# Altium PCB 175-00024_rev1, Backplane, Instrument Crate.PcbDoc (part 4 of 4)
Units mil, origin at the board's own origin, x right, y up, seen from the top; angles counter-clockwise.
Board outline 8400 x 10183.07 mil, 8 copper layers (Top Layer (*.GTL), Mid-Layer 1 (*.G1), +24V (*.GP1), RTN (*.GP2), +3.3V (*.GP3), +12V (*.GP4), Signal GND (*.GP5), Bottom Layer (*.GBL)); 192 components, 150 nets, 1439 pads, 415 vias.
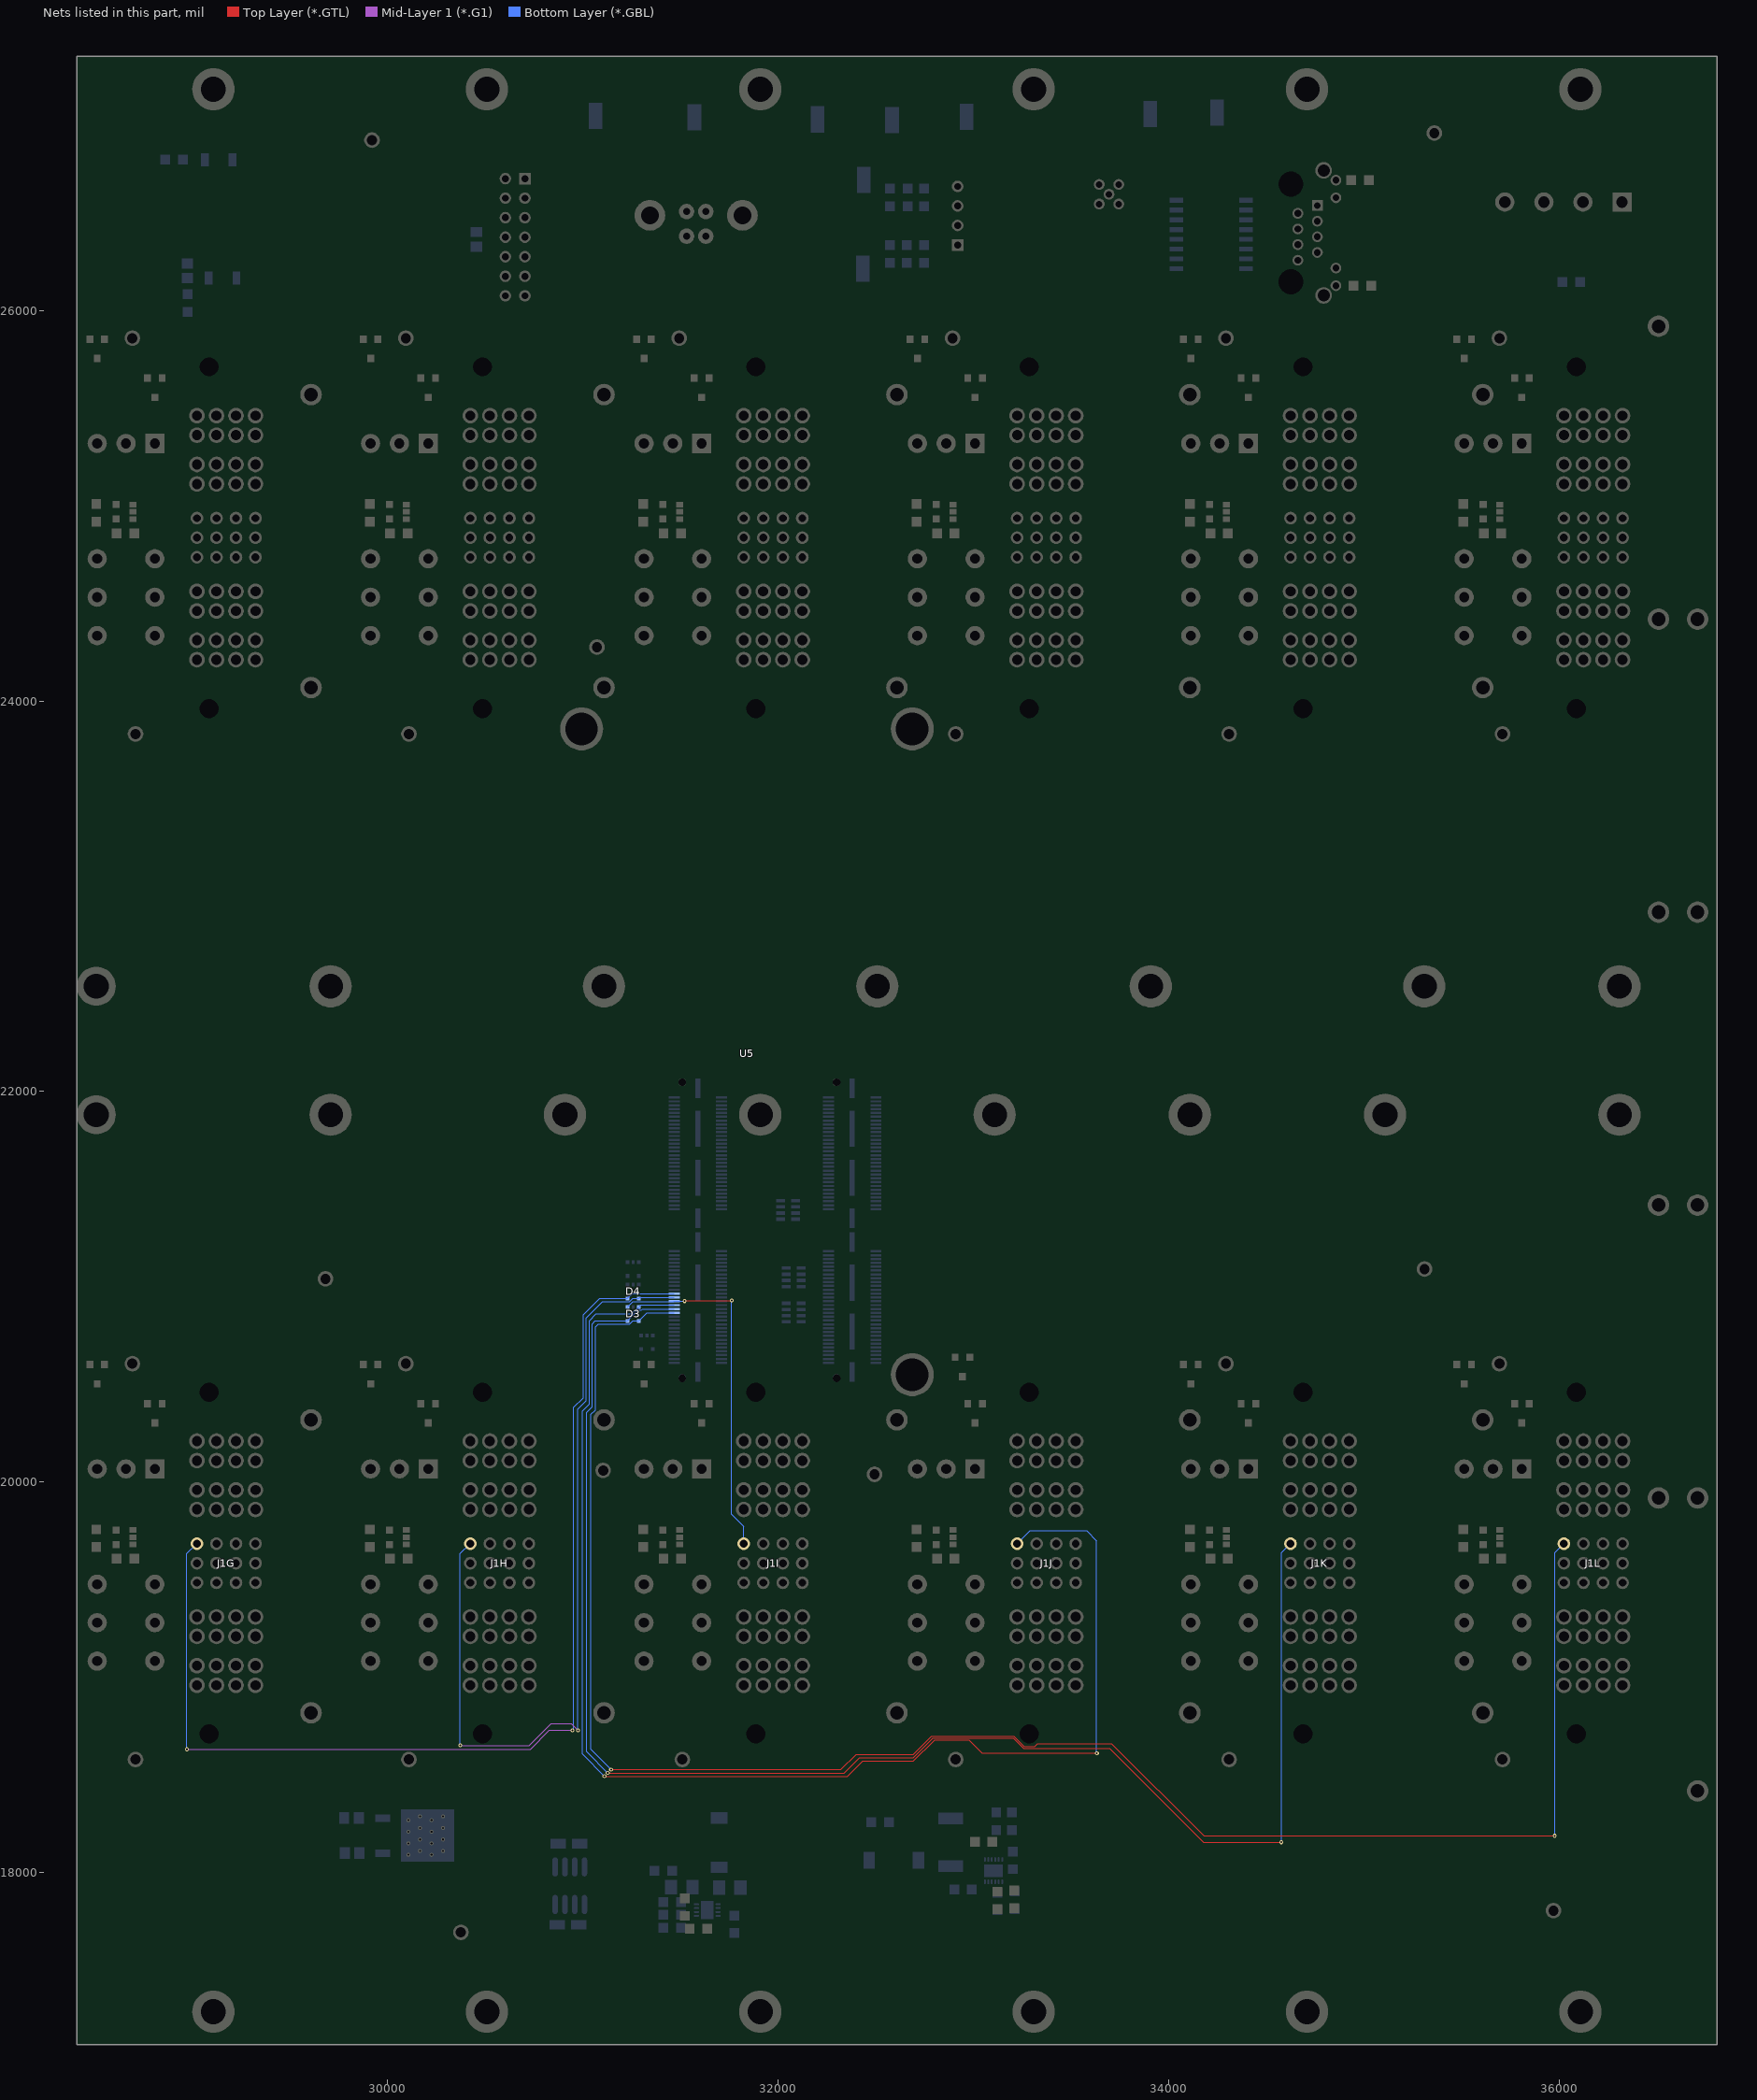
[diagram p10: the nets of this part, all layers, seen from the top]

## Via types
v1: diameter 20, hole 10, Top Layer (*.GTL) to Bottom Layer (*.GBL), 337 vias
v2: diameter 24, hole 10, Top Layer (*.GTL) to Bottom Layer (*.GBL), 48 vias
v3: diameter 50, hole 28, Top Layer (*.GTL) to Bottom Layer (*.GBL), 26 vias
v4: diameter 25.98, hole 12.99, Top Layer (*.GTL) to Bottom Layer (*.GBL), tented top, 4 vias

## Nets (pads, with @x,y where several pads share a name; then routed paths per layer and width w, separated by ;. In a path a pad name is that pad's centre, name@x,y a point inside that pad or via, vN(x,y) a via of type N, cw(c..) or ccw(c..) an arc to the next point about the centre after c; other vN are vias at no path point) (continued)
~CS_SLOT7: D4.5 J1G.9 U5.A83 | length 5750.1
  Mid-Layer 1 (*.G1) w5: v1(28975,18632.08) 30734,18632.08 30831,18729.08 v1(30949,18729.08)
  Bottom Layer (*.GBL) w5: v1(28975,18632.08) 28974,18633.08 28974,19633.64 J1G.9@29025.5,19685.14 ; v1(30949,18729.08) 30955,18735.08 30955,18845.08 30955,20383.53 31003.77,20432.3 31003.77,20857.3 31087.2,20940.73 D4.5@31230,20940.73 31254.76,20965.5 U5.A83@31469.12,20965.5
~CS_SLOT8: D4.4 J1H.9 U5.A85 | length 4341.8
  Mid-Layer 1 (*.G1) w5: v1(30374,18652.08) 30726,18652.08 30838.5,18764.58 30941.5,18764.58 v1(30977,18729.08)
  Bottom Layer (*.GBL) w5: v1(30374,18652.08) 30374,19633.64 J1H.9@30425.5,19685.14 ; v1(30977,18729.08) 30977,18845.08 30977,20374.42 31019.33,20416.75 31019.33,20841.75 31101.97,20924.39 31242.53,20924.39 31258.88,20940.73 D4.4@31289.06,20940.73 31294.13,20945.81 U5.A85@31469.12,20945.81
~CS_SLOT9: D3.1 J1I.9 U5.A87 | length 1819.9
  Top Layer (*.GTL) w5: v1(31522,20927.08) 31525,20930.08 v1(31764,20930.08)
  Bottom Layer (*.GBL) w5: D3.1@31230,20896.6 31257.79,20924.39 31467.39,20924.39 U5.A87@31469.12,20926.13 31470.07,20927.08 v1(31522,20927.08) ; v1(31764,20930.08) 31762,20928.08 31762,19835.91 31825.5,19772.41 J1I.9@31825.5,19685.14
~CS_SLOT10: D3.3 J1J.9 U5.A89 | length 7033.6
  Top Layer (*.GTL) w5: v1(31112.06,18494.14) 32356.94,18494.14 32434.94,18572.14 32695,18572.14 32802.94,18680.08 32978.46,18680.08 33046.73,18611.81 v1@33634,18611.81
  Bottom Layer (*.GBL) w5: v1(31112.06,18494.14) 30999,18607.2 30999,20365.3 31034.89,20401.19 31034.89,20826.19 31069.79,20861.1 31250.94,20861.1 31286.44,20896.6 D3.3@31289.06,20896.6 31298.9,20906.44 U5.A89@31469.12,20906.44 ; J1J.9@33225.5,19685.14 33292.44,19752.08 33581,19752.08 33633,19700.08 33633,18613.08 v1(33634,18612.08)
~CS_SLOT11: D3.5 J1K.9 U5.A91 | length 8100
  Top Layer (*.GTL) w5: v1(31129.03,18511.11) 32339.97,18511.11 32417.97,18589.11 32695,18589.11 32794.97,18689.08 33205.62,18689.08 33258.06,18636.64 33318.94,18636.64 33319.11,18636.81 33699.34,18636.81 34181.07,18155.08 v1@34579,18155.08
  Bottom Layer (*.GBL) w5: v1(31129.03,18511.11) 31021,18619.14 31021,20356.19 31050.44,20385.64 31050.44,20810.64 31065.54,20825.73 D3.5@31230,20825.73 31284.52,20880.26 31301.59,20880.26 31308.09,20886.76 U5.A91@31469.12,20886.76 ; v1(34579,18156.08) 34579,19638.64 J1K.9@34625.5,19685.14
~CS_SLOT12: D3.4 J1L.9 U5.A93 | length 9395.1
  Top Layer (*.GTL) w5: v1(31146,18528.08) 32323,18528.08 32401,18606.08 32695,18606.08 32787,18698.08 33209.35,18698.08 33261.78,18645.64 33315.22,18645.64 33331.38,18661.81 33709.69,18661.81 34181.42,18190.08 v1@35979,18190.08
  Bottom Layer (*.GBL) w5: v1(31146,18528.08) 31043,18631.08 31043,20347.08 31066,20370.08 31066,20795.08 31080.31,20809.39 31242.53,20809.39 31258.88,20825.73 D3.4@31289.06,20825.73 31330.39,20867.07 U5.A93@31469.12,20867.07 ; v1(35978,18189.08) 35979,18190.08 35979,19638.64 J1L.9@36025.5,19685.14
pads on no net: D5.5 J1A.0 J1A.3 J1A.4 J1A.7 J1A.8 J1B.0 J1B.3 J1B.4 J1B.7 J1B.8 J1C.0 J1C.3 J1C.4 J1C.7 J1C.8 J1D.0 J1D.3 J1D.4 J1D.7 J1D.8 J1E.0 J1E.3 J1E.4 J1E.7 J1E.8 J1F.0 J1F.3 J1F.4 J1F.7 J1F.8 J1G.0 J1G.3 J1G.4 J1G.7 J1G.8 J1H.0 J1H.3 J1H.4 J1H.7 J1H.8 J1I.0 J1I.3 J1I.4 J1I.7 J1I.8 J1J.0 J1J.3 J1J.4 J1J.7 J1J.8 J1K.0 J1K.3 J1K.4 J1K.7 J1K.8 J1L.0 J1L.3 J1L.4 J1L.7 J1L.8 J2.3 J3.4 J3.5 J3.7 J3.8 J3.MH1 J3.MH2 K1A.12 K1B.12 K1C.12 K1D.12 K1E.12 K1F.12 K1G.12 K1H.12 K1I.12 K1J.12 K1K.12 K1L.12 L1.2 L1.4 L1.5 L1.7 L1.12 L1.13 U5.0 U5.1 U5.A2 U5.A4 U5.A6 U5.A8 U5.A10 U5.A12 U5.A14 U5.A16 U5.A18 U5.A20 U5.A22 U5.A24 U5.A26 U5.A28 U5.A30 U5.A32 U5.A34 U5.A36 U5.A38 U5.A40 U5.A41 U5.A42 U5.A43 U5.A44 U5.A46 U5.A48 U5.A50 U5.A52 U5.A54 U5.A56 U5.A57 U5.A58 U5.A59 U5.A60 U5.A61 U5.A62 U5.A63 U5.A64 U5.A65 U5.A67 U5.A69 U5.A72 U5.A74 U5.A76 U5.A78 U5.A80 U5.A82 U5.A84 U5.A86 U5.A88 U5.A90 U5.A92 U5.A94 U5.A96 U5.A97 U5.A98 U5.A99 U5.A100 U5.A101 U5.A102 U5.A104 U5.A106 U5.A107 U5.A108 U5.A110 U5.A112 U5.A113 U5.A114 U5.A115 U5.A116 U5.A117 U5.A118 U5.A119 U5.A120 U5.B1 U5.B3 U5.B5 U5.B7 U5.B9 U5.B11 U5.B13 U5.B15 U5.B17 U5.B19 U5.B21 U5.B23 U5.B25 U5.B27 U5.B29 U5.B31 U5.B33 U5.B35 U5.B37 U5.B39 U5.B41 U5.B43 U5.B45 U5.B69 U5.B90 U5.B91 U5.B92 U5.B93 U5.B94 U5.B95 U5.B96 U5.B97 U5.B98 U5.B99 U5.B100 U5.B101 U5.B102 U5.B103 U5.B104 U5.B105 U5.B106 U5.B107 U5.B108 U5.B109 U5.B110 U5.B111 U5.B112 U5.B113 U5.B114 U5.B115 U5.B116 U5.B117 U5.B118 U5.B119 U5.B120 U21.3 U21.11 U22.1 U22.6 U22.7 U23.3 U23.4
copper on no net: | length 426.6
  Bottom Layer (*.GBL) w10: 35378.9,17586 ccw(c35311,17586) 35378.9,17586

## Polygon pours and split planes (outlines as drawn)
+24V on Bottom Layer (*.GBL) "Bottom Layer-AGND" (solid, pour order 20): 33143.8,18053.34 33238.8,18053.34 33238.8,18168.34 33143.8,18168.34 33143.8,18053.34
GND on Bottom Layer (*.GBL) "Bottom Layer-AGND" (solid, pour order 21): 33137,17975.08 33137,18053.34 33237,18053.34 33237,17975.08 33137,17975.08
+3.3V on Bottom Layer (*.GBL) "Bottom Layer-AGND" (solid, pour order 22): 32419.8,17872.52 32419.8,17823.34 33083.82,17823.34 33083.82,17958.1 33085,17959.08 33083.82,17958.1 33072.05,17958.1 33072.05,17872.52 32419.8,17872.52
NetC11_1 on Bottom Layer (*.GBL) "Top Layer (*.GTL)-No Net" (solid, pour order 16): 32939.12,17866.32 32939.12,17970.58 32809.45,17970.58 32809.45,18106.11 33053.83,18106.11 33058.81,18100.9 33063.8,18106.11 33063.8,18356.32 32689.75,18356.32 32669.8,18356.32 32669.8,17866.32 32939.12,17866.32
+3.3V on Bottom Layer (*.GBL) "Top Layer (*.GTL)-No Net" (solid, pour order 18): 32684.8,17856.32 32679.8,17861.32 32679.8,18356.32 32419.8,18356.32 32419.8,17856.32 32679.8,17856.32
NetC11_1 on Bottom Layer (*.GBL) "Top Layer (*.GTL)-No Net" (solid, pour order 17): 33063.8,18336.32 33084.8,18336.32 33084.8,18051.32 33082.78,18053.34 33063.8,18053.34 33063.8,18336.32
NetD1_1 on Bottom Layer (*.GBL) "Bottom Layer-AGND" (solid, pour order 19): 33063.8,18053.34 33032.37,18053.34 33032.37,17963.34 32799.8,17963.34 32799.8,18098.34 33063.8,18098.34 33063.8,18053.34
+12V on Bottom Layer (*.GBL) "Bottom Layer-AGND" (solid, pour order 26): 31385.98,17819.54 31385.98,18326 31784.98,18326 31782.9,18323.73 31782.9,17815 31390.15,17815 31385.98,17819.54
GND on Bottom Layer (*.GBL) "Bottom Layer-AGND" (solid, pour order 23): 31608.98,17835.96 31515.98,17835.96 31515.98,17973.04 31516.98,17974 31742.98,17974 31742.98,17880.05 31670.98,17880.05 31670.98,17835 31609.98,17835 31608.98,17835.96
NetL3_1 on Bottom Layer (*.GBL) "Bottom Layer-AGND" (solid, pour order 24): 31680.98,17838 31680.98,17978 31677.98,17981 31637.98,17981 31637.98,18066 31782.98,18066 31782.98,17834 31684.98,17834 31680.98,17838
+24V on Bottom Layer (*.GBL) "Bottom Layer-AGND" (solid, pour order 25): 31682.98,17812 31682.98,17826 31682.98,17850 31683.98,17851 31771.98,17851 31771.98,17985 31885.98,17985 31885.98,17811 31884.98,17812 31682.98,17812
NetK1F_11 on +24V (*.GP1) (split plane): 35909.9,24644 35909.9,24449.1 35440.1,24449.1 35440.1,24933.9 35909.9,24933.9
NetK1E_11 on +24V (*.GP1) (split plane): 34509.9,24644 34509.9,24449.1 34040.1,24449.1 34040.1,24933.9 34509.9,24933.9
NetJ1F_13 on +24V (*.GP1) (split plane): 36474.9,24164.1 35440.1,24164.1 35440.1,24438.9 35915,24438.9 35916.95,24439.29 35918.6,24440.4 35919.71,24442.05 35920.1,24444 35920.1,24638.9 36474.9,24638.9
NetJ1E_13 on +24V (*.GP1) (split plane): 35074.9,24164.1 34040.1,24164.1 34040.1,24438.9 34515,24438.9 34516.95,24439.29 34518.6,24440.4 34519.71,24442.05 34520.1,24444 34520.1,24638.9 35074.9,24638.9
NetJ1D_13 on +24V (*.GP1) (split plane): 33674.9,24164.1 32640.1,24164.1 32640.1,24438.9 33115,24438.9 33116.95,24439.29 33118.6,24440.4 33119.71,24442.05 33120.1,24444 33120.1,24638.9 33674.9,24638.9
NetK1D_11 on +24V (*.GP1) (split plane): 33109.9,24644 33109.9,24449.1 32640.1,24449.1 32640.1,24933.9 33109.9,24933.9
NetJ1C_13 on +24V (*.GP1) (split plane): 32274.9,24164.1 31240.1,24164.1 31240.1,24438.9 31715,24438.9 31716.95,24439.29 31718.6,24440.4 31719.71,24442.05 31720.1,24444 31720.1,24638.9 32274.9,24638.9
NetJ1L_13 on +24V (*.GP1) (split plane): 36474.89,18912.92 35440.09,18912.92 35440.09,19187.72 35914.99,19187.72 35916.94,19188.11 35918.59,19189.21 35919.7,19190.87 35920.09,19192.82 35920.09,19387.72 36474.89,19387.72
NetK1L_11 on +24V (*.GP1) (split plane): 35909.89,19392.82 35909.89,19197.92 35440.09,19197.92 35440.09,19682.72 35909.89,19682.72
NetJ1K_13 on +24V (*.GP1) (split plane): 35074.89,18912.92 34040.09,18912.92 34040.09,19187.72 34514.99,19187.72 34516.94,19188.11 34518.59,19189.21 34519.7,19190.87 34520.09,19192.82 34520.09,19387.72 35074.89,19387.72
NetK1K_11 on +24V (*.GP1) (split plane): 34509.89,19392.82 34509.89,19197.92 34040.09,19197.92 34040.09,19682.72 34509.89,19682.72
NetK1J_11 on +24V (*.GP1) (split plane): 33109.89,19392.82 33109.89,19197.92 32640.09,19197.92 32640.09,19682.72 33109.89,19682.72
NetJ1J_13 on +24V (*.GP1) (split plane): 33674.89,18912.92 32640.09,18912.92 32640.09,19187.72 33114.99,19187.72 33116.94,19188.11 33118.59,19189.21 33119.7,19190.87 33120.09,19192.82 33120.09,19387.72 33674.89,19387.72
NetK1C_11 on +24V (*.GP1) (split plane): 31709.9,24644 31709.9,24449.1 31240.1,24449.1 31240.1,24933.9 31709.9,24933.9
NetJ1B_13 on +24V (*.GP1) (split plane): 30874.9,24164.1 29840.1,24164.1 29840.1,24438.9 30315,24438.9 30316.95,24439.29 30318.6,24440.4 30319.71,24442.05 30320.1,24444 30320.1,24638.9 30874.9,24638.9
NetK1I_11 on +24V (*.GP1) (split plane): 31709.89,19392.82 31709.89,19197.92 31240.09,19197.92 31240.09,19682.72 31709.89,19682.72
NetK1B_11 on +24V (*.GP1) (split plane): 30309.9,24644 30309.9,24449.1 29840.1,24449.1 29840.1,24933.9 30309.9,24933.9
NetK1A_11 on +24V (*.GP1) (split plane): 28909.9,24644 28909.9,24449.1 28440.1,24449.1 28440.1,24933.9 28909.9,24933.9
NetJ1A_13 on +24V (*.GP1) (split plane): 29474.9,24164.1 28440.1,24164.1 28440.1,24438.9 28915,24438.9 28916.95,24439.29 28918.6,24440.4 28919.71,24442.05 28920.1,24444 28920.1,24638.9 29474.9,24638.9
NetJ1I_13 on +24V (*.GP1) (split plane): 32274.89,18912.92 31240.09,18912.92 31240.09,19187.72 31714.99,19187.72 31716.94,19188.11 31718.59,19189.21 31719.7,19190.87 31720.09,19192.82 31720.09,19387.72 32274.89,19387.72
+24V on +24V (*.GP1) (split plane): 36789.9,17139.1 28430.1,17139.1 28430.1,18906.78 28430.28,18905.87 28431.38,18904.21 28433.04,18903.11 28434.99,18902.72 29479.99,18902.72 29481.94,18903.11 29483.59,18904.21 29484.7,18905.87 29485.09,18907.82 29485.09,19392.82 29484.7,19394.77 29483.59,19396.42 29481.94,19397.53 29479.99,19397.92 28920.09,19397.92 28920.09,19687.82 28919.7,19689.77 28918.59,19691.42 28916.94,19692.53 28914.99,19692.92 28434.99,19692.92 28433.04,19692.53 28431.38,19691.42 28430.28,19689.77 28430.1,19688.86 28430.1,24158.02 28430.29,24157.05 28431.4,24155.4 28433.05,24154.29 28435,24153.9 29480,24153.9 29481.95,24154.29 29483.6,24155.4 29484.71,24157.05 29485.1,24159 29485.1,24644 29484.71,24645.95 29483.6,24647.6 29481.95,24648.71 29480,24649.1 28920.1,24649.1 28920.1,24939 28919.71,24940.95 28918.6,24942.6 28916.95,24943.71 28915,24944.1 28435,24944.1 28433.05,24943.71 28431.4,24942.6 28430.29,24940.95 28430.1,24939.98 28430.1,27281.97 36789.9,27281.97
NetJ1H_13 on +24V (*.GP1) (split plane): 30874.89,18912.92 29840.09,18912.92 29840.09,19187.72 30314.99,19187.72 30316.94,19188.11 30318.59,19189.21 30319.7,19190.87 30320.09,19192.82 30320.09,19387.72 30874.89,19387.72
NetK1H_11 on +24V (*.GP1) (split plane): 30309.89,19392.82 30309.89,19197.92 29840.09,19197.92 29840.09,19682.72 30309.89,19682.72
NetK1G_11 on +24V (*.GP1) (split plane): 28909.89,19392.82 28909.89,19197.92 28440.09,19197.92 28440.09,19682.72 28909.89,19682.72
NetJ1G_13 on +24V (*.GP1) (split plane): 29474.89,18912.92 28440.09,18912.92 28440.09,19187.72 28914.99,19187.72 28916.94,19188.11 28918.59,19189.21 28919.7,19190.87 28920.09,19192.82 28920.09,19387.72 29474.89,19387.72
RTN on RTN (*.GP2) (split plane): 36789.9,17139.1 28430.1,17139.1 28430.1,27281.97 36789.9,27281.97
+3.3V on +3.3V (*.GP3) (split plane): 36789.9,17139.1 28430.1,17139.1 28430.1,27281.97 36789.9,27281.97
+12V on +12V (*.GP4) (split plane): 36789.9,17139.1 28430.1,17139.1 28430.1,27281.97 36789.9,27281.97
GND on Signal GND (*.GP5) (split plane): 36789.9,17139.1 28430.1,17139.1 28430.1,27281.97 36789.9,27281.97

## Other copper
Top Layer (*.GTL):
  text "*.GTL - TOP LAYER GERBER DATA" at 31185,16073 h80
Mid-Layer 1 (*.G1):
  text "*.G1 - MID LAYER 1 GERBER DATA" at 31189,16073 h80
Bottom Layer (*.GBL):
  text "PCB, 175-00029, REV 1" at 35321,17849 h60
  text "BACKPLANE, INSTRUMENT CRATE" at 35338,17716 h60
  text "LAS CUMBRES OBSERVATORY" at 34753,17571 h60
  text "c  2011" at 35333,17566 h60
  text "*.GBL - BOTTOM LAYER GERBER DATA" at 31185,16073 h80
+24V (*.GP1) (plane layer: these items are gaps in the copper):
  lines w10: 28434.99,19192.82 28434.99,18907.82 29479.99,18907.82 29479.99,19392.82 28914.99,19392.82 ; 28434.99,19192.82 28914.99,19192.82 28914.99,19392.82 ; 28434.99,19192.82 28434.99,19687.82 28914.99,19687.82 28914.99,19392.82 ; 28435,24444 28435,24939 28915,24939 28915,24644 ; 28435,24444 28915,24444 28915,24644 ; 28435,24444 28435,24159 29480,24159 29480,24644 28915,24644 ; 29834.99,19192.82 29834.99,18907.82 30879.99,18907.82 30879.99,19392.82 30314.99,19392.82 ; 29834.99,19192.82 30314.99,19192.82 30314.99,19392.82 ; 29834.99,19192.82 29834.99,19687.82 30314.99,19687.82 30314.99,19392.82 ; 29835,24444 29835,24159 30880,24159 30880,24644 30315,24644 ; 29835,24444 30315,24444 30315,24644 ; 29835,24444 29835,24939 30315,24939 30315,24644 ; 31234.99,19192.82 31234.99,18907.82 32279.99,18907.82 32279.99,19392.82 31714.99,19392.82 ; 31234.99,19192.82 31714.99,19192.82 31714.99,19392.82 ; 31234.99,19192.82 31234.99,19687.82 31714.99,19687.82 31714.99,19392.82 ; 31235,24444 31235,24159 32280,24159 32280,24644 31715,24644 ; 31235,24444 31715,24444 31715,24644 ; 31235,24444 31235,24939 31715,24939 31715,24644 ; 32634.99,19192.82 32634.99,18907.82 33679.99,18907.82 33679.99,19392.82 33114.99,19392.82 ; 32634.99,19192.82 33114.99,19192.82 33114.99,19392.82 ; 32634.99,19192.82 32634.99,19687.82 33114.99,19687.82 33114.99,19392.82 ; 32635,24444 32635,24159 33680,24159 33680,24644 33115,24644 ; 32635,24444 33115,24444 33115,24644 ; 32635,24444 32635,24939 33115,24939 33115,24644 ; 34034.99,19192.82 34034.99,18907.82 35079.99,18907.82 35079.99,19392.82 34514.99,19392.82 ; 34034.99,19192.82 34514.99,19192.82 34514.99,19392.82 ; 34034.99,19192.82 34034.99,19687.82 34514.99,19687.82 34514.99,19392.82 ; 34035,24444 34035,24159 35080,24159 35080,24644 34515,24644 ; 34035,24444 34515,24444 34515,24644 ; 34035,24444 34035,24939 34515,24939 34515,24644 ; 35434.99,19192.82 35434.99,18907.82 36479.99,18907.82 36479.99,19392.82 35914.99,19392.82 ; 35434.99,19192.82 35914.99,19192.82 35914.99,19392.82 ; 35434.99,19192.82 35434.99,19687.82 35914.99,19687.82 35914.99,19392.82 ; 35435,24444 35435,24159 36480,24159 36480,24644 35915,24644 ; 35435,24444 35915,24444 35915,24644 ; 35435,24444 35435,24939 35915,24939 35915,24644
  text "*.GP1 - INTERNAL PLANE LAYER 1 GERBER DATA" at 31204,16073 h80
RTN (*.GP2) (plane layer: these items are gaps in the copper):
  text "*.GP2 - INTERNAL PLANE LAYER 2 GERBER DATA" at 31185,16073 h80
+12V (*.GP4) (plane layer: these items are gaps in the copper):
  text "*.GP4 - INTERNAL PLANE LAYER 4 GERBER DATA" at 31185,16073 h80
Signal GND (*.GP5) (plane layer: these items are gaps in the copper):
  text "*.GP5- INTERNAL PLANE LAYER 5 GERBER DATA" at 31185,16073 h80
+3.3V (*.GP3) (plane layer: these items are gaps in the copper):
  text "*.GP3- INTERNAL PLANE LAYER 3 GERBER DATA" at 31213,16073 h80

## Silkscreen, mask and mechanical layers (free items; w line width, h text height)
Top Overlay:
  circle w10: c32688.41,20550.14 r111.73
  rectangle: 35050,17790 35434,18112
  text "SCH, 780-00029 Rev:" at 33850,17952 h60
  text "BACKPLANE, INSTRUMENT CRATE" at 33838,17674 h60
  text "*.GTO - TOP OVERLAY GERBER DATA" at 31185,16073 h80
Bottom Overlay:
  text "SCL" at 34315,27124 h60
  text "+3.3V" at 31214,27112.08 h60
  text "SDA" at 33981,27112 h60
  text "+5V" at 31661,27107.08 h60
  text "-12V" at 32330,27097.08 h60
  text "+12V" at 32714,27097.08 h60
  text "+24V" at 33098,27097.08 h60
  text "GND" at 35436,26997.08 h60
  text "GND" at 30010,26970.08 h60
  text "ALL ON" at 29455,26878.08 h120
  text "+24V" at 36340,26850 h60
  text "GND" at 35891,26844 h60
  text "JTAG" at 30487,26640 h60
  text "ALL OFF" at 29423,26310.08 h120
  text "GND" at 35395,21194.08 h60
  text "GND" at 29761,21125 h60
  text "GND" at 36057,17887 h60
  text "GND" at 30448,17752 h60
  text "*GBO - BOTTOM OVERLAY GERBER DATA" at 31185,16073 h80
Top Paste:
  text "*.GTP - TOP-SIDE SOLDER PASTE MASK" at 31184.99,16073.01 h80
Bottom Paste:
  text "*.GBP - BOTTOM-SIDE SOLDER PASTE MASK" at 31184.99,16073.01 h80
Top Solder:
  text "*.GTS - TOP SOLDER MASK GERBER DATA" at 31185,16073 h80
Bottom Solder:
  rectangle: 33346,17485 35397,17945
  text "*.GBS - BOTTOM SOLDER MASK GERBER DATA" at 31185,16073 h80
Mechanical 1:
  lines w25: 28725.24,20751.36 ccw(c28825.24,20751.36) 28825.24,20651.36 29374.76,20651.36 ; 28820.24,22762.08 cw(c28820.24,22862.08) 28720.24,22862.08 28720.24,23671.11 ; 28821.21,22761.6 29370.24,22761.6 ccw(c29370.24,22861.6) 29470.24,22861.6 29470.24,23671.6 ; 28824.76,20651.36 cw(c28824.76,20751.36) 28724.76,20751.36 28724.76,21560.39 cw(c28824.76,21560.39) 28824.76,21660.39 ; 28825.24,21660.88 29374.76,21660.88 cw(c29374.76,21560.88) 29474.76,21560.88 29474.76,20750.88 cw(c29374.76,20750.88) 29374.76,20650.88 28825.72,20650.88 ; 29375.24,20651.84 ccw(c29375.24,20751.84) 29475.24,20751.84 ; 30105.24,20741.36 ccw(c30205.24,20741.36) 30205.24,20641.36 30754.76,20641.36 ; 30204.76,20641.36 cw(c30204.76,20741.36) 30104.76,20741.36 30104.76,21550.39 cw(c30204.76,21550.39) 30204.76,21650.39 ; 30205.24,21650.88 30754.76,21650.88 cw(c30754.76,21550.88) 30854.76,21550.88 30854.76,20740.88 cw(c30754.76,20740.88) 30754.76,20640.88 30205.72,20640.88 ; 30220.24,22762.08 cw(c30220.24,22862.08) 30120.24,22862.08 30120.24,23671.11 ; 30221.21,22761.6 30770.24,22761.6 ccw(c30770.24,22861.6) 30870.24,22861.6 30870.24,23671.6 ; 30755.24,20641.84 ccw(c30755.24,20741.84) 30855.24,20741.84 ; 31644.76,22752.32 cw(c31644.76,22852.32) 31544.76,22852.32 31544.76,23661.36 ; 31645.72,22751.84 32194.76,22751.84 ccw(c32194.76,22851.84) 32294.76,22851.84 32294.76,23661.84 ; 33004.76,22762.32 cw(c33004.76,22862.32) 32904.76,22862.32 32904.76,23671.36 ; 33005.72,22761.84 33554.76,22761.84 ccw(c33554.76,22861.84) 33654.76,22861.84 33654.76,23671.84 ; 33045.24,20741.36 ccw(c33145.24,20741.36) 33145.24,20641.36 33694.76,20641.36 ; 33144.76,20641.36 cw(c33144.76,20741.36) 33044.76,20741.36 33044.76,21550.39 cw(c33144.76,21550.39) 33144.76,21650.39 ; 33145.24,21650.88 33694.76,21650.88 cw(c33694.76,21550.88) 33794.76,21550.88 33794.76,20740.88 cw(c33694.76,20740.88) 33694.76,20640.88 33145.72,20640.88 ; 33695.24,20641.84 ccw(c33695.24,20741.84) 33795.24,20741.84 ; 34365.24,21660.39 ccw(c34365.24,21560.39) 34265.24,21560.39 34265.24,20751.36 ; 34365.73,21660.88 34915.24,21660.88 cw(c34915.24,21560.88) 35015.24,21560.88 35015.24,20750.88 cw(c34915.24,20750.88) 34915.24,20650.88 34366.21,20650.88 ; 34404.76,22772.32 cw(c34404.76,22872.32) 34304.76,22872.32 34304.76,23681.36 ; 34405.72,22771.84 34954.76,22771.84 ccw(c34954.76,22871.84) 35054.76,22871.84 35054.76,23681.84 ; 34914.76,20651.36 34365.24,20651.36 ; 34915.24,20651.84 ccw(c34915.24,20751.84) 35015.24,20751.84 ; 35655.24,20761.36 ccw(c35755.24,20761.36) 35755.24,20661.36 36304.76,20661.36 ; 35744.76,22762.32 cw(c35744.76,22862.32) 35644.76,22862.32 35644.76,23671.36 ; 35745.72,22761.84 36294.76,22761.84 ccw(c36294.76,22861.84) 36394.76,22861.84 36394.76,23671.84 ; 35754.76,20661.36 cw(c35754.76,20761.36) 35654.76,20761.36 35654.76,21570.39 cw(c35754.76,21570.39) 35754.76,21670.39 ; 35755.24,21670.88 36304.76,21670.88 cw(c36304.76,21570.88) 36404.76,21570.88 36404.76,20760.88 cw(c36304.76,20760.88) 36304.76,20660.88 35755.72,20660.88 ; 36305.24,20661.84 ccw(c36305.24,20761.84) 36405.24,20761.84 ; 36810,27292.07 36810,17119 28410,17119 28410,27302.07 36810,27302.07 ; 28720.24,23671.11 cw(c28820.24,23671.11) 28820.24,23771.11 ccw(c28820.24,23671.11) 28720.24,23671.11 ; 29370.24,23771.6 cw(c29370.24,23671.6) 29470.24,23671.6 ; 29370.24,23771.6 cw(c29370.24,23671.6) 29470.24,23671.6 ; 29370.24,23771.6 28820.73,23771.6 29370.24,23771.6 ; 30120.24,23671.11 cw(c30220.24,23671.11) 30220.24,23771.11 ccw(c30220.24,23671.11) 30120.24,23671.11 ; 30770.24,23771.6 cw(c30770.24,23671.6) 30870.24,23671.6 ; 30770.24,23771.6 cw(c30770.24,23671.6) 30870.24,23671.6 ; 30770.24,23771.6 30220.73,23771.6 30770.24,23771.6 ; 31544.76,23661.36 cw(c31644.76,23661.36) 31644.76,23761.36 ccw(c31644.76,23661.36) 31544.76,23661.36 ; 32194.76,23761.84 cw(c32194.76,23661.84) 32294.76,23661.84 ; 32194.76,23761.84 cw(c32194.76,23661.84) 32294.76,23661.84 ; 32194.76,23761.84 31645.24,23761.84 32194.76,23761.84 ; 32904.76,23671.36 cw(c33004.76,23671.36) 33004.76,23771.36 ccw(c33004.76,23671.36) 32904.76,23671.36 ; 33554.76,23771.84 cw(c33554.76,23671.84) 33654.76,23671.84 ; 33554.76,23771.84 cw(c33554.76,23671.84) 33654.76,23671.84 ; 33554.76,23771.84 33005.24,23771.84 33554.76,23771.84 ; 34265.24,20751.36 ccw(c34365.24,20751.36) 34365.24,20651.36 ; 34265.24,20751.36 ccw(c34365.24,20751.36) 34365.24,20651.36 ; 34304.76,23681.36 cw(c34404.76,23681.36) 34404.76,23781.36 ccw(c34404.76,23681.36) 34304.76,23681.36 ; 34954.76,23781.84 cw(c34954.76,23681.84) 35054.76,23681.84 ; 34954.76,23781.84 cw(c34954.76,23681.84) 35054.76,23681.84 ; 34954.76,23781.84 34405.24,23781.84 34954.76,23781.84 ; 35644.76,23671.36 cw(c35744.76,23671.36) 35744.76,23771.36 ccw(c35744.76,23671.36) 35644.76,23671.36 ; 36294.76,23771.84 cw(c36294.76,23671.84) 36394.76,23671.84 ; 36294.76,23771.84 cw(c36294.76,23671.84) 36394.76,23671.84 ; 36294.76,23771.84 35745.24,23771.84 36294.76,23771.84
Mechanical 2:
  lines w10: 16128,12140 37128,12140 37128,28140 16128,28140 16128,12140 ; 33073,12246 ccw(c33123,12246) 33123,12196 33453,12196 ccw(c33453,12236) 33493,12236 33493,12406 ccw(c33453,12406) 33453,12446 33073,12446 33073,12246 ; 33073,12536 ccw(c33123,12536) 33123,12486 37023,12486 ccw(c37023,12536) 37073,12536 37073,12726 ccw(c37023,12726) 37023,12776 33073,12776 33073,12536 ; 33073,12866 ccw(c33123,12866) 33123,12816 35003,12816 ccw(c35003,12866) 35053,12866 35053,13016 ccw(c35003,13016) 35003,13066 33073,13066 33073,12866 ; 33073,13146 ccw(c33113,13146) 33113,13106 33923,13106 ccw(c33923,13156) 33973,13156 33973,13306 ccw(c33923,13306) 33923,13356 33073,13356 33073,13146 ; 33533,12236 ccw(c33573,12236) 33573,12196 35533,12196 ccw(c35533,12236) 35573,12236 35573,12406 ccw(c35533,12406) 35533,12446 33533,12446 33533,12236 ; 34013,13156 ccw(c34063,13156) 34063,13106 35003,13106 ccw(c35003,13156) 35053,13156 35053,13306 ccw(c35003,13306) 35003,13356 34013,13356 34013,13156 ; 35093,12866 ccw(c35143,12866) 35143,12816 37023,12816 ccw(c37023,12866) 37073,12866 37073,13016 ccw(c37023,13016) 37023,13066 35093,13066 35093,12866 ; 35093,13156 ccw(c35143,13156) 35143,13106 36083,13106 ccw(c36083,13156) 36133,13156 36133,13306 ccw(c36083,13306) 36083,13356 35093,13356 35093,13156 ; 35613,12246 ccw(c35663,12246) 35663,12196 35993,12196 ccw(c35993,12236) 36033,12236 36033,12406 ccw(c35993,12406) 35993,12446 35613,12446 35613,12246 ; 36073,12236 ccw(c36113,12236) 36113,12196 37023,12196 ccw(c37023,12246) 37073,12246 37073,12396 ccw(c37023,12396) 37023,12446 36073,12446 36073,12236 ; 36173,13156 ccw(c36223,13156) 36223,13106 37023,13106 ccw(c37023,13156) 37073,13156 37073,13306 ccw(c37023,13306) 37023,13356 36173,13356 36173,13156
  lines w17: 16660,17088.5 22240,17088.5 ; 16660,17400.7 22240,17400.7 ; 16600,13501 ccw(c16701,13501) 16701,13400 22199,13400 ccw(c22199,13501) 22300,13501 22300,17899 ccw(c22199,17899) 22199,18000 16701,18000 ccw(c16701,17899) 16600,17899 16600,13501
  lines w20: 16148.06,12785.88 cw(c16198,12711) 16198,12801 ; 16198,12761 ccw(c16198,12711) 16148,12711 16148,12221 ccw(c16198,12221) 16198,12171 19398,12171 ccw(c19398,12221) 19448,12221 19448,12561 ccw(c19398,12561) 19398,12611 ; 19472.88,12171.06 ccw(c19398,12221) 19488,12221 19488,12561 ; 33029.17,12156.02 cw(c33123,12246) 32993,12246 32993,13916 cw(c33123,13916) 33123,14046 37023,14046 cw(c37023,13916) 37111.66,14011.08 ; 23658,12320 ccw(c23788,12320) 23788,12190 28528,12190 ccw(c28528,12320) 28658,12320 28658,13910 ccw(c28528,13910) 28528,14040 23788,14040 ccw(c23788,13910) 23658,13910 23658,12320 ; 33033,12246 ccw(c33123,12246) 33123,12156 37023,12156 ccw(c37023,12246) 37113,12246 37113,13916 ccw(c37023,13916) 37023,14006 33123,14006 ccw(c33123,13916) 33033,13916 33033,12246
  lines w24: 26208,12350 26358,12350 ; 26208,12600 26358,12600 ; 26208,12850 26358,12850 ; 26208,13100 26358,13100 ; 26208,13350 26358,13350
  lines w30: 15628,11640 37628,11640 37628,28640 15628,28640 15628,11640
  lines w50: 33218,13505 34868,13505 ; 33218,13885 34868,13885 ; 34868,13505 33208,13505 33208,13885 34868,13885 ; 34868,13505 34868,13885
  text "NOTES (UNLESS OTHERWISE SPECIFIED):" at 16448,27616 h90
  text "GENERAL" at 16548,27416 h90
  text "1)" at 16648,27215.95 h75
  text "PCB IS x-LAYER, .062\" THICK." at 16848,27215.97 h75
  text "2)" at 16648,27065.95 h75
  text "CONSTRUCTION IS SOLDER-MASK-OVER-BARE-COPPER (SMOBC)." at 16848,27065.95 h75
  text "3)" at 16648,26915.95 h75
  text "ACCEPTABILITY SHALL BE BASED ON IPC-A-600, CLASS 2." at 16848,26915.95 h75
  text "4)" at 16648,26765.95 h75
  text "THE FOLLOWING GERBER RS274X PHOTO TOOL FILES SHALL BE USED TO DEFINE ALL CIRCUIT FEATURES:" at 16848,26765.95 h75
  text "*.GTL - TOP LAYER GERBER DATA" at 17122,26555 h80
  text "*.G1 - MID LAYER 1 GERBER DATA" at 17122,26401.33 h80
  text "*.GP1 - INTERNAL PLANE LAYER 1 GERBER DATA" at 17122,25940.34 h80
  text "*.GP2 - INTERNAL PLANE LAYER 2 GERBER DATA" at 17122,25786.67 h80
  text "*.GP3- INTERNAL PLANE LAYER 3 GERBER DATA" at 17122,25633 h80
  text "*.GP4 - INTERNAL PLANE LAYER 4 GERBER DATA" at 17122,25479.34 h80
  text "*.GP5- INTERNAL PLANE LAYER 5 GERBER DATA" at 17122,25325.67 h80
  text "*.GBL - BOTTOM LAYER GERBER DATA" at 17122,25172 h80
  text "*.GTO - TOP OVERLAY GERBER DATA" at 17122,25018.34 h80
  text "*.GTS - TOP SOLDER MASK GERBER DATA" at 17122,24864.67 h80
  text "*.GTP - TOP-SIDE SOLDER PASTE MASK" at 17121.99,24711 h80
  text "*GBO - BOTTOM OVERLAY GERBER DATA" at 17122,24557.34 h80
  text "*.GBS - BOTTOM SOLDER MASK GERBER DATA" at 17122,24403.67 h80
  text "*.GBP - BOTTOM-SIDE SOLDER PASTE MASK" at 17121.99,24250 h80
  text "5)" at 16551,23534.23 h75
  text "THE PHOTO TOOL SHALL NOT BE COMPENSATED WITHOUT PRIOR ENGINEERING APPROVAL." at 16751,23534.23 h75
  text "PCB DESIGNER: RICH LOBDILL   PH (805) 880-1621  FAX (805) 961-1792." at 16751,23384.28 h75
  text "FABRICATION TOLERANCES" at 16606,23058 h90
  text "6)" at 16706,22857.95 h75
  text "END PRODUCT CONDUCTOR WIDTHS AND PAD DIAMETERS SHALL NOT VARY MORE THAN" at 16906,22857.95 h75
  text "0.002\" FROM THE 1:1 DIMENSIONS OF THE MASTER ARTWORK." at 16906,22708 h75
  text "7)" at 16706,22557.95 h75
  text "THE CONDUCTIVE PATTERN SHALL BE POSITIONED SO THAT THE LOCATION OF ANY PAD OR" at 16906,22557.95 h75
  text "LAND SHALL BE WITHIN 0.005\" DIAMETER TO THE TRUE POSITION OF THE HOLE IT CIRCUMSCRIBES." at 16906,22408 h75
  text "8)" at 16706,22257.95 h75
  text "ALL DRILL HOLE SIZES AND TOLERANCES APPLY AFTER PLATING." at 16906,22257.95 h75
  text "9)" at 16706,22107.95 h75
  text "THE MINIMUM ANNULAR RING SHALL BE 0.005\"." at 16906,22107.95 h75
  text "10)" at 16651,21957.95 h75
  text "BOW AND TWIST SHALL NOT EXCEED 0.010\" PER INCH." at 16906,21957.95 h75
  text "11)" at 16661,21807.95 h75
  text "FOR PCB ROUTING DIMENSIONS: .XXX = +/-.005\"  .XX = +/-.020\"" at 16906,21807.95 h75
  text "MATERIAL" at 16606,21608 h90
  text "12)" at 16651,21407.95 h75
  text "BASE MATERIAL IS FR4 EPOXY FIBERGLASS" at 16913,21402 h75
  text "SEE STACK-UP LEGEND FOR COPPER CLADDING CALL OUTS" at 16913,21262 h75
  text "13)" at 16651,21257.95 h75
  text "PLATING" at 16606,21058 h90
  text "14)" at 16651,20862.95 h75
  text "ALL HOLES AND CONDUCTIVE SURFACES SHALL BE PLATED WITH A MINIMUM OF 0.001\" COPPER." at 16906,20862.95 h75
  text "15)" at 16651,20712.95 h75
  text "AFTER SOLDERMASK, ALL EXPOSED HOLES AND CONDUCTIVE SURFACES SHALL BE COATED" at 16906,20712.95 h75
  text "WITH A GOLD IMMERSION PLATING TO PRESERVE SOLDERABILITY." at 16913,20562 h75
  text "COATINGS" at 16606,20363 h90
  text "16)" at 16656,20167.95 h75
  text "THE SOLDERMASK SHALL BE BLACK LIQUID PHOTO-IMAGEABLE PER IPC-SM-840, TYPE-B, CLASS 2." at 16906,20167.95 h75
  text "17)" at 16651,20017.95 h75
  text "THE SOLDERMASK REGISTRATION ALLOWANCE IS 0.003\".  THERE SHALL BE NO SOLDERMASK ON" at 16906,20017.95 h75
  text "ANY SOLDER PAD OR LAND." at 16906,19867.95 h75
  text "MARKING" at 16606,19668 h90
  text "18)" at 16651,19472.95 h75
  text "THE LEGEND SHALL BE SCREEN-PRINTED USING PERMANENT YELLOW EPOXY INK." at 16906,19472.95 h75
  text "19)" at 16651,19322.95 h75
  text "THE SCREEN PRINTING REGISTRATION ALLOWANCE IS 0.007\".  THERE SHALL BE NO INK ON ANY" at 16906,19322.95 h75
  text "SOLDER PAD OR LAND." at 16906,19173 h75
  text "20)" at 16641,19022.95 h75
  text "THE VENDOR CODE AND UL FLAMMABILITY RATING MAY BE ETCHED IN THE FOIL OR MARKED IN" at 16906,19022.95 h75
  text "PERMANENT EPOXY INK (VENDOR'S OPTION)." at 16906,18873 h75
  text "ELECTRICAL TESTING" at 16606,18673 h90
  text "21)" at 16651,18477.95 h75
  text "ALL BOARDS SHALL BE ELECTRICALLY TESTED TO THE SUPPLIED IPC-D-356A NET LIST" at 16906,18477.95 h75
  text "FOR CONTINUITY, OPENS AND SHORTS." at 16906,18328 h75
  text "Layer Stack Up Detail for: 175-00024_rev1, Backplane, Instrument Crate.PcbDoc" at 16660,17651.25 h72
  text "Layer" at 16660,17284.2 h72
  text "COPPER THICKNESS" at 19200,17200 h100
  text "Name" at 16660,17140.2 h72
  text "1/2 oz,  1 oz Finished" at 19000,16900 h100
  text "Top Layer (*.GTL)" at 16660,16862.5 h101
  text "Mid-Layer 1 (*.G1)" at 16660,16427.5 h101
  text "1 oz" at 19000,16400 h100
  text "2 oz" at 19000,16000 h100
  text "+24V (*.GP1)" at 16660,15992.5 h101
  text "2 oz" at 19000,15600 h100
  text "RTN (*.GP2)" at 16660,15557.5 h101
  text "+3.3V (*.GP3)" at 16660,15122.5 h101
  text "1 oz" at 19000,15100 h100
  text "1 oz" at 19000,14700 h100
  text "+12V (*.GP4)" at 16660,14687.5 h101
  text "1 oz" at 19000,14300 h100
  text "Signal GND (*.GP5)" at 16660,14252.5 h101
  text "Las Cumbres Observatory, Inc." at 35038,13865 h90
  text "Bottom Layer (*.GBL)" at 16660,13817.5 h101
  text "1/2 oz,  1 oz Finished" at 18900,13800 h100
  text "Las Cumbres Observatory" at 33268,13745 h150
  text "PRIMARY PCB SPECIFICATIONS" at 24105,13730 h200
  text "6740 Cortona Dr." at 35478,13711 h90
  text "Global Telescope Network" at 33428,13585 h125
  text "Goleta, CA 93117" at 35428,13561 h90
  text "(REFER TO COMPLETE SPEC LISTING AT LEFT FOR FURTHER DETAILS)" at 23758,13525 h100
  text "www.lcogt.net" at 35568,13415 h90
  text "DATE" at 33093,13304.2 h32
  text "DESIGNED" at 34033,13304.2 h32
  text "DRAWN" at 35113,13304.2 h32
  text "SCALE" at 36193,13304.2 h32
  text "NUMBER OF LAYERS" at 23858,13275 h150
  text "8" at 27408,13274.98 h150
  text "Rich Lobdill" at 35418,13205 h55
  text "Rich Lobdill" at 34293,13200 h55
  text "1 : 1" at 36478,13186 h90
  text "6/2/2011" at 33123,13179 h90
  text "FINISHED THICKNESS" at 23858,13025 h150
  text ".062\"" at 27233,13025 h150
  text "CHECKED/DATE" at 33093,13014.2 h32
  text "APPROVED/DATE" at 35113,13014.2 h32
  text "BASE MATERIAL" at 23858,12775 h150
  text "FR4" at 27158,12775 h150
  text "TITLE" at 33093,12724.2 h32
  text "175-00024, BACKPLANE, INSTRUMENT CRATE" at 33313,12580 h100
  text "GOLD IMMERSION" at 26664,12558 h150
  text "PLATING TYPE" at 23858,12525 h150
  text "THIS DRAWING EMBODIES A PROPRIETARY DESIGN OWNED BY LAS CUMBRES" at 16238,12501 h60
  text "OBSERVATORY.  IT IS SUBMITTED FOR A SPECIFIC PURPOSE UNDER A CON-" at 16238,12401 h60
  text "SIZE" at 33093,12394.2 h32
  text "DOC NO." at 33553,12394.2 h32
  text "REV" at 35633,12394.2 h32
  text "SHEET" at 36093,12394.2 h32
  text "FIDENTIAL RELATIONSHIP, AND EXCEPT FOR PURPOSES EXPRESSLY GRANTED" at 16238,12306 h60
  text "OF" at 36523,12291 h60
  text "SOLDER MASK COLOR" at 23858,12275 h150
  text "BLACK" at 27283,12275 h150
  text "1" at 36353,12271 h100
  text "X" at 36753,12271 h100
  text "1" at 35778,12258 h130
  text "-" at 34108,12256 h130
  text "GPT" at 34827.72,12241.2 h130
  text "C" at 33228,12240 h100
  text "IN WRITING, ALL RIGHTS ARE RESERVED BY LAS CUMBRES OBSERVATORY." at 16238,12216 h60
Mechanical 5:
  text "175-00024  REV 1" at 31206.03,16478.58 h80
  text "LAS CUMBRES OBSERVATORY     6/2/2011" at 31206.03,16328.57 h80
Drill Drawing:
  lines w10: 16128,12140 37128,12140 37128,28140 16128,28140 16128,12140 ; 33073,12246 ccw(c33123,12246) 33123,12196 33453,12196 ccw(c33453,12236) 33493,12236 33493,12406 ccw(c33453,12406) 33453,12446 33073,12446 33073,12246 ; 33073,12536 ccw(c33123,12536) 33123,12486 37023,12486 ccw(c37023,12536) 37073,12536 37073,12726 ccw(c37023,12726) 37023,12776 33073,12776 33073,12536 ; 33073,12856 ccw(c33113,12856) 33113,12816 34533,12816 ccw(c34533,12866) 34583,12866 34583,13016 ccw(c34533,13016) 34533,13066 33073,13066 33073,12856 ; 33533,12236 ccw(c33573,12236) 33573,12196 35533,12196 ccw(c35533,12236) 35573,12236 35573,12406 ccw(c35533,12406) 35533,12446 33533,12446 33533,12236 ; 34623,12866 ccw(c34673,12866) 34673,12816 36083,12816 ccw(c36083,12866) 36133,12866 36133,13016 ccw(c36083,13016) 36083,13066 34623,13066 34623,12866 ; 35613,12246 ccw(c35663,12246) 35663,12196 35993,12196 ccw(c35993,12236) 36033,12236 36033,12406 ccw(c35993,12406) 35993,12446 35613,12446 35613,12246 ; 36073,12236 ccw(c36113,12236) 36113,12196 37023,12196 ccw(c37023,12246) 37073,12246 37073,12396 ccw(c37023,12396) 37023,12446 36073,12446 36073,12236 ; 36173,12866 ccw(c36223,12866) 36223,12816 37023,12816 ccw(c37023,12866) 37073,12866 37073,13016 ccw(c37023,13016) 37023,13066 36173,13066 36173,12866
  lines w20: 16153.06,12770.88 cw(c16203,12696) 16203,12786 ; 16203,12746 ccw(c16203,12696) 16153,12696 16153,12206 ccw(c16203,12206) 16203,12156 19403,12156 ccw(c19403,12206) 19453,12206 19453,12546 ccw(c19403,12546) 19403,12596 ; 19477.88,12156.06 ccw(c19403,12206) 19493,12206 19493,12546 ; 33027.92,12157.34 cw(c33123,12246) 32993,12246 32993,13066 cw(c33073,13066) 33073,13146 37023,13146 cw(c37023,13016) 37111.66,13111.08 ; 33033,12246 ccw(c33123,12246) 33123,12156 37023,12156 ccw(c37023,12246) 37113,12246 37113,13016 ccw(c37023,13016) 37023,13106 33073,13106 ccw(c33073,13066) 33033,13066 33033,12246
  lines w30: 15628,11640 37628,11640 37628,28640 15628,28640 15628,11640
  text ".Legend" at 22486,17657 h100
  text "DESIGNED" at 33093,13014.2 h32
  text "DRAWN" at 34643,13014.2 h32
  text "SCALE" at 36193,13014.2 h32
  text "Rich Lobdill" at 33579,12918 h55
  text "Rich Lobdill" at 35140,12916 h55
  text "1 : 1" at 36478,12896 h90
  text "TITLE" at 33093,12724.2 h32
  text "175-00024, BACKPLANE, INSTRUMENT CRATE" at 33310,12580 h100
  text "THIS DRAWING EMBODIES A PROPRIETARY DESIGN OWNED BY LAS CUMBRES" at 16243,12486 h60
  text "SIZE" at 33093,12394.2 h32
  text "DOC NO." at 33553,12394.2 h32
  text "REV" at 35633,12394.2 h32
  text "SHEET" at 36093,12394.2 h32
  text "OBSERVATORY.  IT IS SUBMITTED FOR A SPECIFIC PURPOSE UNDER A CON-" at 16243,12386 h60
  text "FIDENTIAL RELATIONSHIP, AND EXCEPT FOR PURPOSES EXPRESSLY GRANTED" at 16243,12291 h60
  text "OF" at 36523,12291 h60
  text "2" at 36338,12271 h100
  text "X" at 36753,12271 h100
  text "-" at 34108,12256 h130
  text "1" at 35773,12256 h130
  text "C" at 33228,12240 h120
  text "GD1" at 34928,12240 h120
  text "IN WRITING, ALL RIGHTS ARE RESERVED BY LAS CUMBRES OBSERVATORY." at 16243,12201 h60

## Dimensions
19700,15900 to 22600,17000 on Mechanical 2
28720,23266.6 to 27100,24100 on Mechanical 2
28410,17119 to 36810,17119 on Mechanical 2
28410,17119 to 28410,27302.07 on Mechanical 2

## Text inside footprints (layer, text, board x,y; h text height)
J1A: Top Overlay "15" at 29465.51,25146.32 h40; Top Overlay "14" at 29470.51,24491.32 h40; Top Overlay "12" at 29465.51,24921.32 h40; Top Overlay "4" at 29470.51,24716.32 h40; Top Overlay "13" at 29470.51,24256.32 h40; Top Overlay "1" at 28895.51,24716.32 h40; Top Overlay "16" at 29465.51,25386.32 h40
J1B: Top Overlay "15" at 30865.51,25146.32 h40; Top Overlay "14" at 30870.51,24491.32 h40; Top Overlay "12" at 30865.51,24921.32 h40; Top Overlay "4" at 30870.51,24716.32 h40; Top Overlay "13" at 30870.51,24256.32 h40; Top Overlay "1" at 30295.51,24716.32 h40; Top Overlay "16" at 30865.51,25386.32 h40
J1C: Top Overlay "15" at 32265.51,25146.32 h40; Top Overlay "14" at 32270.51,24491.32 h40; Top Overlay "12" at 32265.51,24921.32 h40; Top Overlay "4" at 32270.51,24716.32 h40; Top Overlay "13" at 32270.51,24256.32 h40; Top Overlay "1" at 31695.51,24716.32 h40; Top Overlay "16" at 32265.51,25386.32 h40
J1D: Top Overlay "15" at 33665.51,25146.32 h40; Top Overlay "14" at 33670.51,24491.32 h40; Top Overlay "12" at 33665.51,24921.32 h40; Top Overlay "4" at 33670.51,24716.32 h40; Top Overlay "13" at 33670.51,24256.32 h40; Top Overlay "1" at 33095.51,24716.32 h40; Top Overlay "16" at 33665.51,25386.32 h40
J1E: Top Overlay "15" at 35065.51,25146.32 h40; Top Overlay "14" at 35070.51,24491.32 h40; Top Overlay "12" at 35065.51,24921.32 h40; Top Overlay "4" at 35070.51,24716.32 h40; Top Overlay "13" at 35070.51,24256.32 h40; Top Overlay "1" at 34495.51,24716.32 h40; Top Overlay "16" at 35065.51,25386.32 h40
J1F: Top Overlay "15" at 36465.51,25146.32 h40; Top Overlay "14" at 36470.51,24491.32 h40; Top Overlay "12" at 36465.51,24921.32 h40; Top Overlay "4" at 36470.51,24716.32 h40; Top Overlay "13" at 36470.51,24256.32 h40; Top Overlay "1" at 35895.51,24716.32 h40; Top Overlay "16" at 36465.51,25386.32 h40
J1G: Top Overlay "15" at 29465.5,19895.14 h40; Top Overlay "14" at 29470.5,19240.14 h40; Top Overlay "12" at 29465.5,19670.14 h40; Top Overlay "4" at 29470.5,19465.14 h40; Top Overlay "13" at 29470.5,19005.14 h40; Top Overlay "1" at 28895.5,19465.14 h40; Top Overlay "16" at 29465.5,20135.14 h40
J1H: Top Overlay "15" at 30865.5,19895.14 h40; Top Overlay "14" at 30870.5,19240.14 h40; Top Overlay "12" at 30865.5,19670.14 h40; Top Overlay "4" at 30870.5,19465.14 h40; Top Overlay "13" at 30870.5,19005.14 h40; Top Overlay "1" at 30295.5,19465.14 h40; Top Overlay "16" at 30865.5,20135.14 h40
J1I: Top Overlay "15" at 32265.5,19895.14 h40; Top Overlay "14" at 32270.5,19240.14 h40; Top Overlay "12" at 32265.5,19670.14 h40; Top Overlay "4" at 32270.5,19465.14 h40; Top Overlay "13" at 32270.5,19005.14 h40; Top Overlay "1" at 31695.5,19465.14 h40; Top Overlay "16" at 32265.5,20135.14 h40
J1J: Top Overlay "15" at 33665.5,19895.14 h40; Top Overlay "14" at 33670.5,19240.14 h40; Top Overlay "12" at 33665.5,19670.14 h40; Top Overlay "4" at 33670.5,19465.14 h40; Top Overlay "13" at 33670.5,19005.14 h40; Top Overlay "1" at 33095.5,19465.14 h40; Top Overlay "16" at 33665.5,20135.14 h40
J1K: Top Overlay "15" at 35065.5,19895.14 h40; Top Overlay "14" at 35070.5,19240.14 h40; Top Overlay "12" at 35065.5,19670.14 h40; Top Overlay "4" at 35070.5,19465.14 h40; Top Overlay "13" at 35070.5,19005.14 h40; Top Overlay "1" at 34495.5,19465.14 h40; Top Overlay "16" at 35065.5,20135.14 h40
J1L: Top Overlay "15" at 36465.5,19895.14 h40; Top Overlay "14" at 36470.5,19240.14 h40; Top Overlay "12" at 36465.5,19670.14 h40; Top Overlay "4" at 36470.5,19465.14 h40; Top Overlay "13" at 36470.5,19005.14 h40; Top Overlay "1" at 35895.5,19465.14 h40; Top Overlay "16" at 36465.5,20135.14 h40
J2: Bottom Overlay "2" at 30625,26795.08 h50 r90; Bottom Overlay "1" at 30725,26795.08 h50 r90; Bottom Overlay "14" at 30625,25995.08 h50 r90; Bottom Overlay "13" at 30725,25995.08 h50 r90
P2: Bottom Overlay "1" at 36478,26315.08 h40
U5: Bottom Overlay "B1" at 32269,22105 h50; Bottom Overlay "A1" at 31519,22115 h50